# Altium PCB piponic_pcb_v2.PcbDoc
Units mm, origin at the board's own origin, x right, y up, seen from the top; angles counter-clockwise.
Board outline 79.88 x 73.28 mm, 2 copper layers (Top Layer, Bottom Layer); 32 components, 46 nets, 137 pads, 4 vias.
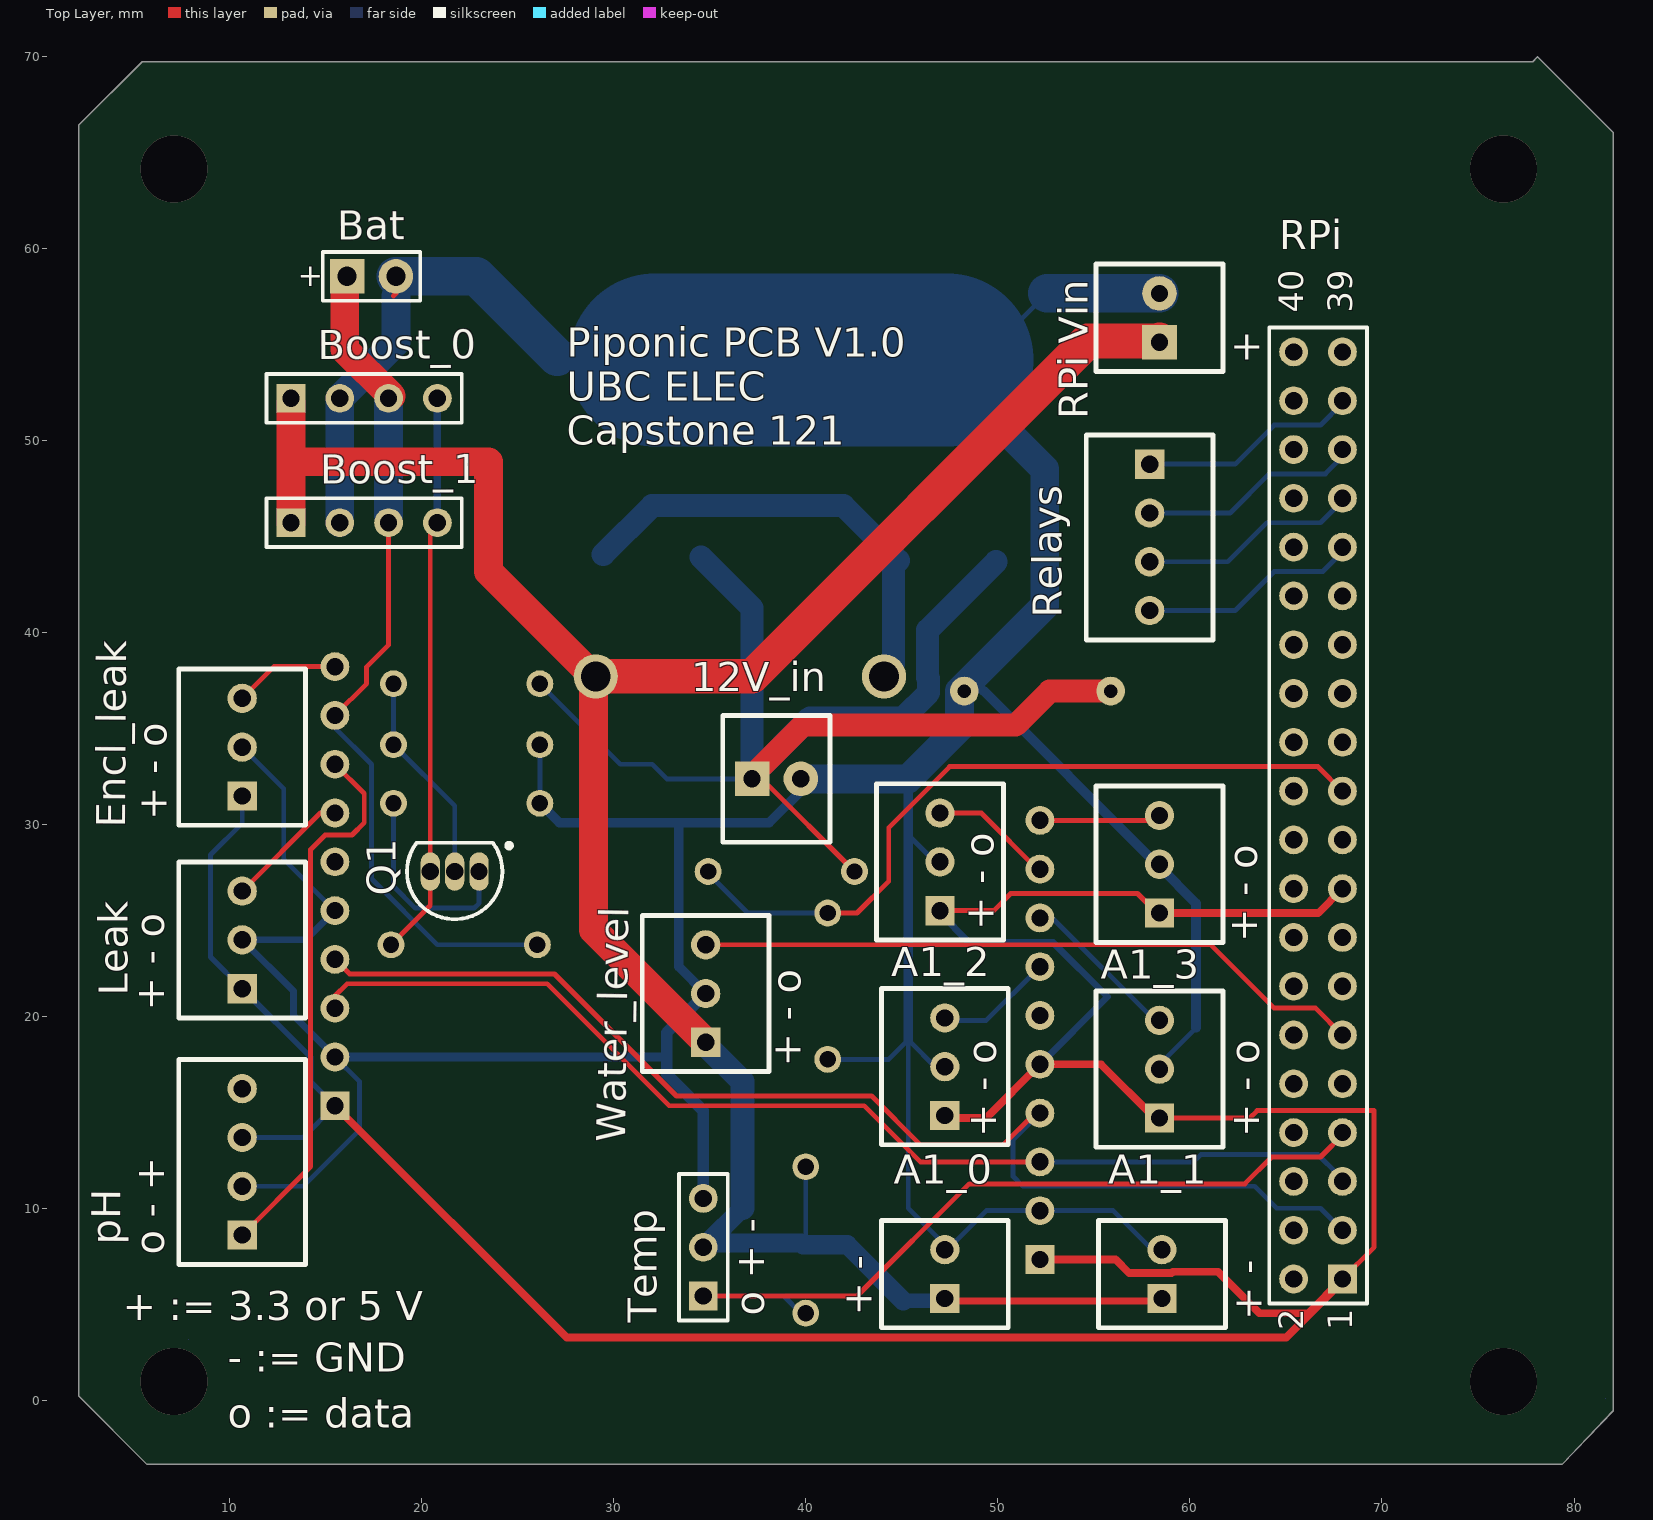
[diagram p0: Top Layer view]
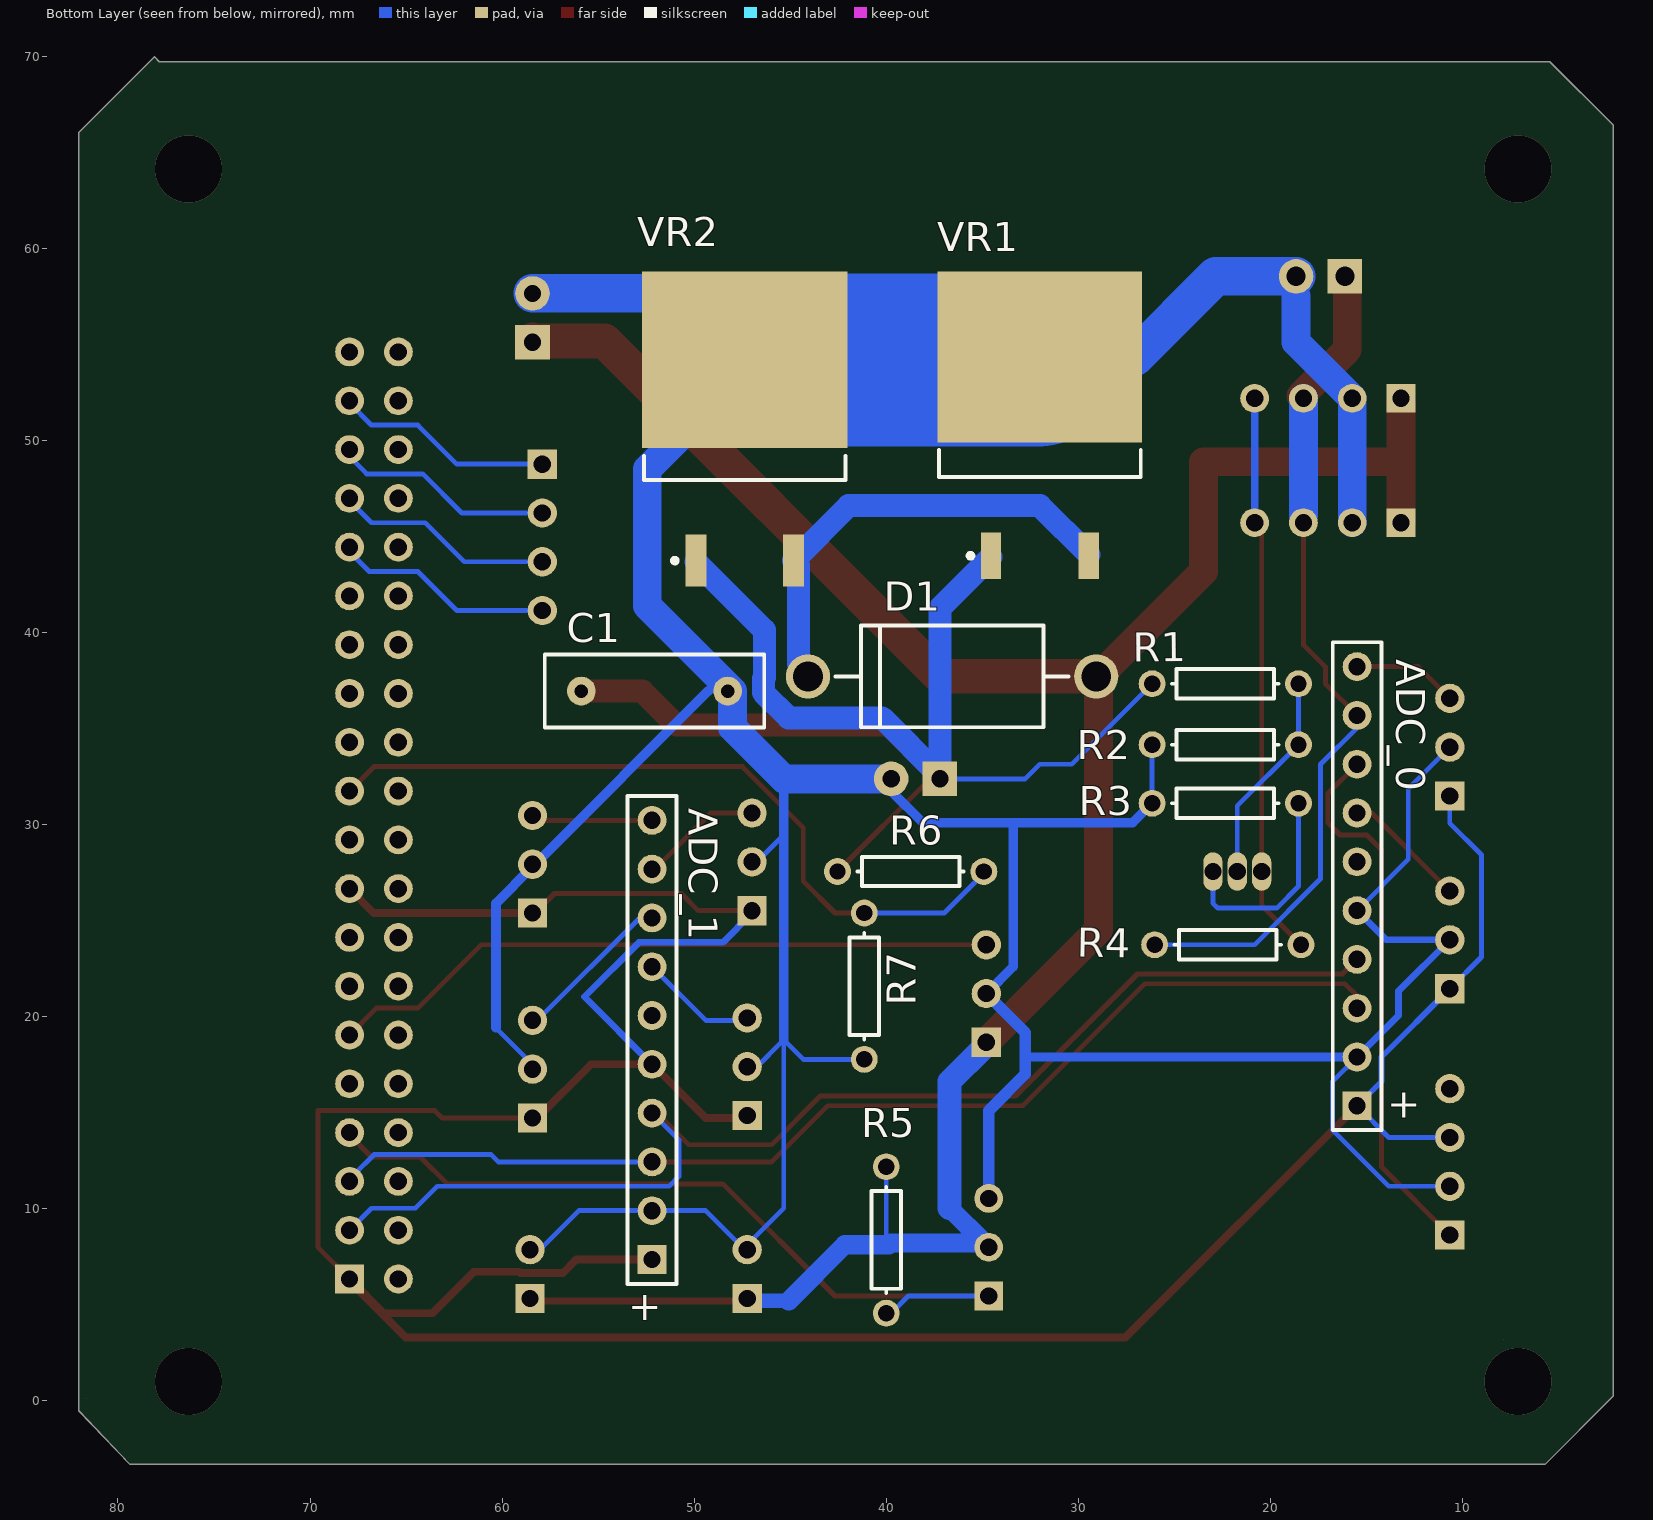
[diagram p1: Bottom Layer view, seen from below]

## Layer stack, top to bottom
Top Solder: solder mask 0.0102, Solder Resist, Dk 3.5
Top Layer: signal copper 0.0356
Dielectric 1: dielectric 0.32, FR-4, Dk 4.8
Bottom Layer: signal copper 0.0356
Bottom Solder: solder mask 0.0102, Solder Resist, Dk 3.5

## Board outline
5.715,-3.302 79.375,-3.302 82.042,-0.508 82.042,-0.381 82.042,66.04 78.105,69.977 77.851,69.723 5.461,69.723 2.159,66.421 2.159,0.254
cut-out: 7.874,3.175
cut-out: -6.477,17.907
cut-out: 84.709,0.127
cut-out: 81.661,0.127

## Design rules (kind name [scope] priority, off if disabled: settings)
Clearance [All] p1: gap=0.254 ignorepadtopadclearanceinfootprint=TRUE except(0: Arc-Hole Track-Hole SMDPad-Hole THPad-Hole Via-Hole Fill-Hole Poly-Hole Region-Hole Text-Hole; 0.1: Arc-Text Track-Text SMDPad-SMDPad SMDPad-Text THPad-Text Via-Text Fill-Text Poly-Text Region-Text Text-Text)
PolygonConnect [All] p1: connectstyle=Relief reliefconductorwidth=0.254 reliefentries=4 polygonreliefangle="90 Angle" airgapwidth=0.254
RoutingVias [All] p1: holewidth=0.711 width=1.27 viastyle="Through Hole" minholewidth=0.711 minwidth=1.27 maxholewidth=0.711 maxwidth=1.27
SilkToSilkClearance [All] p1: silktosilkclearance=0.1
SilkToSolderMaskClearance [IsPad] p1: minsilkscreentomaskgap=0.1 clearancetoexposedcopper=TRUE
SolderMaskExpansion [All] p1: expansion=0.102
Width [All] p1: maxlimit=10 minlimit=0.254 preferedwidth=0.254 checkconnectedcopper=TRUE
28 further rules are at their usual default settings.

## Classes and differential pairs
channel class leak_sensor: Enclosure_leak_detector "Leak Detector"
channel class ADS1115: ADC_0 ADC_1
component class water_quality_sensor_hub: 12V_in "+ -" A1_0 A1_1 A1_2 A1_3 Bat C1 D1 R6 R7 Relays "V1+ -"
component class SHDN_circuit: Q1 R1 R2 R3 R4
component class "Sensor MCU": "RPi " "RPi Vin"
component class SEN0204-ND: Water_level
component class PH0-14: pH
component class "Leak Detector": Leak
component class Enclosure_leak_detector: Encl_leak
component class DS18B21: R5 Temp
component class "Backup Power Boost Board": Boost_0 Boost_1
component class ADC_1: ADC_1
component class 5V_regulator: VR1 VR2

## Components (designator, comment, footprint, x,y, rotation, side; value= is the part's Value field where it differs from the comment)
12V_in "Header 2" 2_channel_terminal_block#1 37.211,32.385 r0 top
"+ -" "5V" 2_channel_terminal_block#2 47.244,5.334 r90 top (schematic designator "V1+ -")
"+ -" "5V" 2_channel_terminal_block#2 58.547,5.334 r90 top (schematic designator "V0+ -")
A1_0 "3V3" 3_channel_terminal_block 47.244,14.859 r90 top
A1_1 "3V3" 3_channel_terminal_block 58.42,14.732 r90 top
A1_2 "3V3" 3_channel_terminal_block 46.99,25.526 r90 top
A1_3 "3V3" 3_channel_terminal_block 58.42,25.4 r90 top
ADC_0 "ADS1*15" HDR1X10 15.494,15.367 r90 bottom (schematic designator ADC_1)
ADC_1 "ADS1*15" HDR1X10 52.197,7.365 r90 bottom
Bat "Battery" BAT-2 17.399,58.547 r0 top
Boost_0 "Header 4" HDR1X4 13.208,52.197 r0 top
Boost_1 "Header 4" HDR1X4 13.208,45.72 r0 top
C1 "Cap" RAD-0.3 52.07,36.957 r0 bottom value=4.7uF
D1 "STPS5L60" STM-DO-201AD 36.576,37.719 r0 bottom
Encl_leak "Leak Sensor" 3_channel_terminal_block 10.668,31.496 r90 top (schematic designator Leak)
Leak "Leak Sensor" 3_channel_terminal_block 10.668,21.463 r90 top
pH "pH Sensor" 4_channel_terminal_block 10.668,8.636 r90 top
Q1 "2N3904" TO-92A 21.729,27.559 r90 top
R1 "Res1" AXIAL-0.3 22.352,37.338 r180 bottom value=10k
R2 "Res1" AXIAL-0.3 22.352,34.163 r180 bottom value=1k
R3 "Res1" AXIAL-0.3 22.352,31.115 r180 bottom value=220
R4 "Res1" AXIAL-0.3 22.225,23.749 r180 bottom value=900k
R5 "" AXIAL-0.3 40.005,8.382 r270 bottom value=4.7K
R6 "Res1" AXIAL-0.3 38.735,27.562 r180 bottom value=10K
R7 "Res1" AXIAL-0.3 41.148,21.59 r90 bottom value=3.9k
Relays "Relay Header" 4_channel_terminal_block 57.912,48.768 r270 top
RPi "Header 20X2" HDR2X20 67.945,6.35 r90 top (schematic designator P12)
"RPi Vin" "RPi Power" 2_channel_terminal_block#1 58.42,55.118 r90 top
Temp "Temp Sensor" HDR1X3 34.671,5.461 r90 top
VR1 "Volt Reg" D2PAK_N 32.004,50.799 r90 bottom
VR2 "Volt Reg" D2PAK_M 47.371,50.599 r90 bottom
Water_level "WL Sensor" 3_channel_terminal_block 34.798,18.668 r90 top

## Footprints (in the part's own frame and the unit in brackets; to place one, negate y for a bottom-side part, rotate by r counter-clockwise, add the part's x,y. Pads: shape width x height; smd on the part's side, far side on the other; paste and mask are expansions set on the pad)
2_channel_terminal_block#1 [mm] "2 Position Wire to Board Terminal Block OSTVN02A150 - Horizontal with Board 0.100\" (2.54mm) Through Hole"
  rect 1.8x1.8 hole 0.9: 1(0,0)
  round 1.8 hole 0.9: 2(2.54,0)
  Top Overlay keep-out lines w0.254: -1.524,-3.302 4.064,-3.302 4.064,3.302 -1.524,3.302 -1.524,-3.302
  silkscreen extent -1.52,-3.3 4.06,3.3
2_channel_terminal_block#2 [mm] "2 Position Wire to Board Terminal Block OSTVN02A150 - Horizontal with Board 0.100\" (2.54mm) Through Hole"
  rect 1.524x1.524 hole 0.9: 1(0,0)
  round 1.524 hole 0.9: 2(2.54,0)
  Top Overlay keep-out lines w0.254: -1.524,3.302 -1.524,-3.302 4.064,-3.302 4.064,3.302 -1.524,3.302
  silkscreen extent -1.52,-3.3 4.06,3.3
3_channel_terminal_block [mil] "OSTVN03A150 - 3Position Wire to Board Terminal Block Horizontal with Board 0.100\" (2.54mm) Through Hole"
  rect 60x60 hole 35.43: 1(0,0)
  round 60 hole 35.43: 2(100,0) 3(200,0)
  Top Overlay keep-out lines w10: -60,130 260,130 260,-130 -60,-130 -60,130
  silkscreen extent -60,-130 260,130
4_channel_terminal_block [mil] "OSTVN04A150 - 4 Position Wire to Board Terminal Block Horizontal with Board 0.100\" (2.54mm) Through Hole"
  rect 60x60 hole 35.43: 1(0,0)
  round 60 hole 35.43: 2(100,0) 3(200,0) 4(300,0)
  Top Overlay keep-out lines w10: -60,130 -60,-130 360,-130 360,130 -60,130
  silkscreen extent -60,-130 360,130
AXIAL-0.3 [mm] "Axial Device, Thru-Hole; 2 Leads; 0.3 in Pin Spacing"
  round 1.4 hole 0.85: 1(-3.81,0) 2(3.81,0)
  silkscreen extent -2.77,-0.76 2.77,0.76
BAT-2 [mm] "Battery; 2 Leads"
  rect 1.8x1.8 hole 1: 1(-1.27,0)
  round 1.8 hole 1: 2(1.27,0)
  silkscreen extent -2.54,-1.27 2.54,1.27
D2PAK_M [mm] "D2-PAK, 4-Leads, Body 8.8x10.4mm, Pitch 2.54mm, Lead Span 15.1mm, IPC Low Density"
  rect 2.7x1.1 smd: 1(-6.85,2.54) 3(-6.85,-2.54)
  rect 9.2x10.7 smd: 2(3.6,0)
  silkscreen extent -6.97,-5.25 -1.4,5.25, body extent -2.65,-5.28 6.35,5.28, height 4.69
D2PAK_N [mm] "D2-PAK, 4-Leads, Body 8.8x10.4mm, Pitch 2.54mm, Lead Span 15.1mm, IPC Medium Density"
  rect 2.4x1.05 smd: 1(-6.8,2.54) 3(-6.8,-2.54)
  rect 8.9x10.65 smd: 2(3.55,0)
  silkscreen extent -6.92,-5.25 -1.3,5.25, body extent -2.7,-5.28 6.3,5.28, height 4.69
HDR1X3 [mm] "Connector; Header; 3 Position"
  rect 1.5x1.5 hole 0.9: 1(0,0)
  round 1.5 hole 0.9: 2(2.54,0) 3(5.08,0)
  silkscreen extent -1.27,-1.27 6.35,1.27
HDR1X4 [mm] "Connector; Header; 4 Position"
  rect 1.5x1.5 hole 0.9: 1(0,0)
  round 1.5 hole 0.9: 2(2.54,0) 3(5.08,0) 4(7.62,0)
  silkscreen extent -1.27,-1.27 8.89,1.27
HDR1X10 [mm] "Connector; Header; 10 Position"
  rect 1.5x1.5 hole 0.9: 1(0,0)
  round 1.5 hole 0.9: 2(2.54,0) 3(5.08,0) 4(7.62,0) 5(10.16,0) 6(12.7,0) 7(15.24,0) 8(17.78,0) 9(20.32,0) 10(22.86,0)
  silkscreen extent -1.27,-1.27 24.13,1.27
HDR2X20 [mm] "Connector; Header; 20x2 Position"
  rect 1.5x1.5 hole 0.9: 1(0,0)
  round 1.5 hole 0.9: 2(0,2.54) 3(2.54,0) 4(2.54,2.54) 5(5.08,0) 6(5.08,2.54) 7(7.62,0) 8(7.62,2.54) 9(10.16,0) 10(10.16,2.54) 11(12.7,0) 12(12.7,2.54) 13(15.24,0) 14(15.24,2.54) 15(17.78,0) 16(17.78,2.54) 17(20.32,0) 18(20.32,2.54) 19(22.86,0) 20(22.86,2.54) 21(25.4,0) 22(25.4,2.54) 23(27.94,0) 24(27.94,2.54) 25(30.48,0) 26(30.48,2.54) 27(33.02,0) 28(33.02,2.54) 29(35.56,0) 30(35.56,2.54) 31(38.1,0) 32(38.1,2.54) 33(40.64,0) 34(40.64,2.54) 35(43.18,0) 36(43.18,2.54) 37(45.72,0) 38(45.72,2.54) 39(48.26,0) 40(48.26,2.54)
  silkscreen extent -1.27,-1.27 49.53,3.81
RAD-0.3 [mm] "Radial Cap, Thru-Hole; 2 Leads; 0.3 in Pin Spacing"
  round 1.5 hole 0.7: 1(-3.81,0) 2(3.81,0)
  silkscreen extent -5.71,-1.91 5.71,1.91
STM-DO-201AD [mm] "THD, 2-Leads, Body 9.5x5.3mm"
  round 2.3 hole 1.55: 1(-7.5,0) 2(7.5,0)
  silkscreen extent -6.08,-2.65 6.07,2.65, body extent -8.15,-2.67 8.15,2.65, height 5.65
TO-92A [mm] "TO, Flat Index; 3 In-Line, Axial Leads; Body Dia. 4.5mm; Leads 0.51 x 0.48 mm (max)"
  oval 2x1 hole 0.9: 1(0,-1.27) 2(0,0) 3(0,1.27)
  silkscreen extent -2.48,-2.96 1.5,2.48, body extent -2.48,-2.5 1.5,2.5, height 6.86

## Part data
12V_in: "Power 12V in", LatestRevisionDate=17-Jul-2002, LatestRevisionNote="Re-released for DXP Platform.", Publisher="Altium Limited"
"+ -" "+ -": library part "Header 2", "Header, 2-Pin", LatestRevisionDate=17-Jul-2002, LatestRevisionNote="Re-released for DXP Platform.", Publisher="Altium Limited"
A1_0 A1_1 A1_2 A1_3 Encl_leak Leak Temp Water_level: library part "Header 3", "Header, 3-Pin", LatestRevisionDate=17-Jul-2002, LatestRevisionNote="Re-released for DXP Platform.", Publisher="Altium Limited"
ADC_0 ADC_1: library part "Header 10", "Header, 10-Pin", LatestRevisionDate=17-Jul-2002, LatestRevisionNote="Re-released for DXP Platform.", Publisher="Altium Limited"
Bat: "2AA batteries", LatestRevisionDate=17-Jul-2002, LatestRevisionNote="Re-released for DXP Platform.", PackageDescription="Battery; 2 Leads", PackageReference=BAT-2, Published=24-Mar-1999, Publisher="Altium Limited"
Boost_0 Boost_1: "Header, 4-Pin", LatestRevisionDate=17-Jul-2002, LatestRevisionNote="Re-released for DXP Platform.", Publisher="Altium Limited"
C1: "Capacitor", LatestRevisionDate=17-Jul-2002, LatestRevisionNote="Re-released for DXP Platform.", PackageDescription="Radial Cap, Thru-Hole; 2 Leads; 0.3 in Pin Spacing", PackageReference=RAD-0.3, Published=8-Jun-2000, Publisher="Altium Limited"
D1: library part CMP-2000-05365-1, "Power Schottky rectifier, 60 V, 5 A, 2-Pin DO-201AD, RoHS, Cut Tape", Capacitance @ Vr, F=-, Current - Average Rectified (Io)=5A, Current - Reverse Leakage @ Vr=220礎@60V, Manufacturer=STMicroelectronics, Operating Temperature - Junction=150degC(Max), Package / Case=DO-201AD,Axial, Package Description="2-Pin Axial Lead, Dia 5.3 mm, Body Length 9.5 mm", Package Reference=DO-201AD, Standard Package=600, Voltage - DC Reverse (Vr) (Max)=60V, Voltage - Forward (Vf) (Max) @ If=520mV@5A, Category=DiscreteSemiconductorProducts, Datasheet URL=http://download.siliconexpert.com/pdfs/2012/8/10/13/5/5/781/st_/manual/cd00002924.pdf, Datasheet Version="Rev. 3, 05/2008", Diode Type=Schottky, Family=Diodes,Rectifiers-Single, Manufacturer URL=http://www.st.com/, Mounting Type=ThroughHole, Online Catalog=SchottkyDiode, Other Names=497-12673-3STPS5L60-ND, Other Related Documents=STPS5L60ViewAllSpecifications, Package URL=http://download.siliconexpert.com/pdfs/2012/8/10/13/5/5/781/st_/manual/cd00002924.pdf, Packaging=Tape&Box(TB)牋, Reverse Recovery Time (trr)=-, Series=-, Speed=FastRecovery=200mA(Io), Supplier Device Package=DO-201AD
pH: library part "Header 4", "Header, 4-Pin", LatestRevisionDate=17-Jul-2002, LatestRevisionNote="Re-released for DXP Platform.", Publisher="Altium Limited"
Q1: "NPN General Purpose Amplifier", ComponentLink1Description="Manufacturer Link", ComponentLink1URL=http://www.fairchildsemi.com/, ComponentLink2Description=Datasheet, ComponentLink2URL=http://www.fairchildsemi.com/ds/2N%2F2N3904.pdf, DatasheetVersion=1997, LatestRevisionDate=15-Jan-2003, LatestRevisionNote="PCB Footprint 'BCY-W3/D4.7' replaced", PackageDescription="TO, Flat Index; 3 In-Line, Axial Leads; Body Dia. 4.5mm; Leads 0.51 x 0.48 mm (max)", PackageReference=TO-92A, PackageVersion=Sep-1998, Published=8-Jun-2000, Publisher="Altium Limited"
R1 R2 R3 R4 R6 R7: "Resistor", LatestRevisionDate=17-Jul-2002, LatestRevisionNote="Re-released for DXP Platform.", PackageDescription="Axial Device, Thru-Hole; 2 Leads; 0.3 in Pin Spacing", PackageReference=AXIAL-0.3, Published=8-Jun-2000, Publisher="Altium Limited"
R5: library part Res1, "Pull up", LatestRevisionDate=17-Jul-2002, LatestRevisionNote="Re-released for DXP Platform.", PackageDescription="Axial Device, Thru-Hole; 2 Leads; 0.3 in Pin Spacing", PackageReference=AXIAL-0.3, Published=8-Jun-2000, Publisher="Altium Limited"
Relays: library part "Header 4", "Relay Control", LatestRevisionDate=17-Jul-2002, LatestRevisionNote="Re-released for DXP Platform.", Publisher="Altium Limited"
RPi: "GPIO shield for RPi", LatestRevisionDate=17-Jul-2002, LatestRevisionNote="Re-released for DXP Platform.", Publisher="Altium Limited"
"RPi Vin": library part "Header 2", "Power Pins", LatestRevisionDate=17-Jul-2002, LatestRevisionNote="Re-released for DXP Platform.", Publisher="Altium Limited"
VR1 VR2: "Voltage Regulator", LatestRevisionDate=29-May-2009, LatestRevisionNote="IPC-7351 Footprint Added.", PackageDescription="3-Pin Transistor Outline Package 2.54 mm Pitch, 15.1 mm Lead Span", PackageReference=D2PAK, Published=24-Mar-1999, Publisher="Altium Limited"

## Via types
v1: diameter 3.5, hole 3.5, Top Layer to Bottom Layer, 4 vias

## Nets (pads, with @x,y where several pads share a name; then routed paths per layer and width w, separated by ;. In a path a pad name is that pad's centre, name@x,y a point inside that pad or via, vN(x,y) a via of type N, cw(c..) or ccw(c..) an arc to the next point about the centre after c; other vN are vias at no path point)
3V3: A1_0.1 A1_1.1 A1_2.1 A1_3.1 ADC_0.1 ADC_1.1 ADC_1.5 Encl_leak.1 Leak.1 pH.3 RPi.1 RPi.17 | length 173.5
  Top Layer w0.254: A1_2.1 49.783,25.526 50.673,26.416 57.277,26.416 A1_3.1@58.293,25.4 ; A1_1.1@58.166,14.731 63.118,14.731 63.5,15.113 69.595,15.113 69.596,15.112 69.596,8.001 RPi.1
  Top Layer w0.4: ADC_0.1 27.559,3.302 65.024,3.302 RPi.1@67.818,6.096 ; A1_0.1@46.99,14.731 49.402,14.731 ADC_1.5 ; ADC_1.1 56.135,7.365 56.842,6.658 59.051,6.658 59.124,6.731 61.468,6.731 63.627,4.572 66.167,4.572 RPi.1 ; ADC_1.5 55.373,17.525 A1_1.1@58.166,14.732 ; A1_3.1@58.293,25.4 66.675,25.4 RPi.17
  Bottom Layer w0.254: pH.3 13.843,13.716 ADC_0.1 ; Leak.1 9.017,23.114 9.017,28.426 10.668,30.077 Encl_leak.1
  Bottom Layer w0.3: Leak.1 14.224,17.907 14.224,16.637 ADC_0.1
  Bottom Layer w0.35: A1_2.1@46.99,25.4 48.514,23.876 52.876,23.876 55.712,21.04 ADC_1.5
5V: "+ -.1" "RPi Vin.1" Boost_0.1 Boost_1.1 D1.1 R5.1 Temp.2 Water_level.1 | length 128.5
  Top Layer w0.254: Boost_0.1@13.208,51.943 Boost_0.1@13.462,52.197
  Top Layer w0.35: 47.626,5.206 58.166,5.206
  Top Layer w1.5: Boost_1.1 Boost_0.1@13.208,51.943 ; 13.462,48.895 23.495,48.895 23.495,43.173 28.949,37.719 28.949,24.518 Water_level.1@34.671,18.796
  Top Layer w1.8: D1.1@28.949,37.719 D1.1 37.211,37.719 54.673,55.181 58.356,55.181 58.42,55.245
  Bottom Layer w0.254: Temp.2 Temp.2@34.893,8.223 ; 39.751,8.223 40.005,8.477 R5.1
  Bottom Layer w0.75: 45.085,5.207 47.626,5.207
  Bottom Layer w1: 36.703,10.033 34.893,8.223 39.751,8.223 ; 39.878,8.128 42.164,8.128 45.085,5.207
  Bottom Layer w1.25: Water_level.1@34.925,18.415 36.703,16.637 36.703,10.033
12V: 12V_in.1 C1.2 R1.1 R6.1 VR1.1 VR2.1 | length 73
  Top Layer w0.254: 12V_in.1 37.722,32.385 R6.1 ; C1.2@55.626,36.957 C1.2
  Top Layer w1.2: 12V_in.1 37.211,32.546 39.844,35.179 50.927,35.179 52.705,36.957 C1.2@55.626,36.957
  Bottom Layer w0.254: R1.1 30.353,33.147 32.004,33.147 32.766,32.385 12V_in.1
  Bottom Layer w1.2: VR1.1@34.544,43.942 37.211,41.275 12V_in.1@37.211,32.546 ; 12V_in.1 12V_in.1@37.211,32.546 ; VR2.1@49.911,43.688 46.355,40.132 46.355,37.668 46.402,37.621 46.402,36.877 45.085,35.56 40.225,35.56 12V_in.1@37.211,32.546
GND: 12V_in.2 "+ -.2" "RPi Vin.2" A1_0.2 A1_1.2 A1_2.2 A1_3.2 ADC_0.2 ADC_0.5 ADC_1.2 Bat.2 Boost_0.2 Boost_1.2 C1.1 Encl_leak.2 Leak.2 pH.2 R2.1 R3.1 R7.1 Temp.3 VR1.2 VR2.2 Water_level.2 | length 255.7
  Top Layer w0.254: 18.542,57.531 Bat.2@18.669,57.658
  Bottom Layer w0.254: pH.2 13.843,11.176 16.764,14.097 16.764,16.637 ADC_0.2 ; Encl_leak.2 12.827,31.877 12.827,28.194 ADC_0.5 ; Boost_1.2@15.748,45.339 Boost_1.2 ; Bat.2@18.669,57.658 Bat.2 ; R3.1 R2.1 ; VR1.2@27.058,54.349 VR1.2 ; 12V_in.2@39.751,31.75 12V_in.2 ; R7.1 44.323,17.78 45.339,18.796 ; 45.339,29.464 A1_2.2@46.736,28.067 ; A1_0.2@46.863,17.272 45.339,18.796 ; VR2.2 49.119,54.199 VR2.2@52.578,57.658 ; 47.498,8.001 49.402,9.905 ADC_1.2 ; 47.625,7.747 45.339,10.033 45.339,18.796 ; C1.1@48.006,36.957 C1.1 49.276,36.957 ; ADC_1.2@51.943,9.906 56.006,9.906 58.166,7.746 ; A1_1.2@58.166,17.272 60.324,19.43
  Bottom Layer w0.35: ADC_0.2 13.335,20.066 13.335,21.336 Leak.2 13.97,24.003 ADC_0.5
  Bottom Layer w0.45: ADC_0.2 32.766,17.907
  Bottom Layer w0.5: R3.1 27.178,30.099 33.401,30.099 ; Water_level.2 33.401,22.605 33.401,30.099 ; 12V_in.2@39.751,31.75 38.1,30.099 33.401,30.099 ; 45.339,18.796 45.339,29.464 45.339,32.385 ; 49.276,36.957 A1_3.2@58.166,28.067 ; A1_3.2@58.166,28.066 58.42,27.812 60.324,25.908 60.324,19.43
  Bottom Layer w0.6: Temp.3 34.671,15.113 32.766,17.018 32.766,17.907 32.766,19.177 Water_level.2
  Bottom Layer w1.5: Boost_1.2 Boost_0.2 18.669,55.118 18.669,57.531 ; 12V_in.2 45.339,32.385 48.006,35.052 48.006,36.957 52.451,41.402 52.451,48.514 VR2.2@47.244,53.721
  Bottom Layer w2: Bat.2 22.86,58.547 VR1.2@27.058,54.349 ; VR2.2@52.578,57.658 58.42,57.658
  Bottom Layer w9: VR1.2@32.161,54.199 VR2.2
NetA1_0_3: A1_0.3 ADC_1.7 | length 6.2
  Bottom Layer w0.254: A1_0.3@46.99,19.811 49.402,19.811 ADC_1.7@52.07,22.479
NetA1_1_3: A1_1.3 ADC_1.8 | length 8.2
  Bottom Layer w0.254: ADC_1.8@52.197,25.273 52.704,25.273 A1_1.3@58.166,19.811
NetA1_2_3: A1_2.3 ADC_1.9 | length 6.5
  Top Layer w0.254: A1_2.3 49.15,30.606 ADC_1.9@52.197,27.559
NetA1_3_3: A1_3.3 ADC_1.10 | length 6.1
  Top Layer w0.254: ADC_1.10 57.784,30.225 A1_3.3@58.166,30.607
NetADC_1_ADC_0_3: ADC_0.3 ADC_1.3 RPi.5 | length 57.5
  Top Layer w0.254: ADC_0.3 15.494,21.082 16.129,21.717 26.543,21.717 32.893,15.367 43.053,15.367 45.974,12.446 ADC_1.3
  Bottom Layer w0.254: ADC_1.3 60.197,12.445 60.579,12.827 66.675,12.827 RPi.5@67.691,11.811
NetADC_1_ADC_0_4: ADC_0.4 ADC_1.4 RPi.3 | length 63.1
  Top Layer w0.254: ADC_0.4 16.256,22.225 26.924,22.225 33.274,15.875 43.434,15.875 45.974,13.335 50.292,13.335 ADC_1.4@51.816,14.859
  Bottom Layer w0.254: ADC_1.4 50.8,13.588 50.8,11.684 51.308,11.176 63.373,11.176 64.516,10.033 66.802,10.033 RPi.3
NetADC_1_ADC_0_6: ADC_0.6
NetADC_1_ADC_0_7: ADC_0.7 Leak.3 | length 6.5
  Top Layer w0.254: Leak.3 14.732,30.607 ADC_0.7
NetADC_1_ADC_0_8: ADC_0.8 pH.1 | length 28.6
  Top Layer w0.254: pH.1 14.224,12.192 14.224,28.702 14.986,29.464 16.383,29.464 17.018,30.099 17.018,31.623 ADC_0.8
NetADC_1_ADC_0_10: ADC_0.10 Encl_leak.3 | length 5.5
  Top Layer w0.254: Encl_leak.3 12.319,38.227 ADC_0.10
NetADC_1_ADC_1_6: ADC_1.6
NetD1_2: D1.2 VR1.3 VR2.3 | length 24.2
  Bottom Layer w0.254: D1.2@43.815,37.592 D1.2@44.577,38.354
  Bottom Layer w1.2: VR1.3@29.464,44.069 32.004,46.609 41.971,46.609 VR2.3 44.577,43.495 D1.2@44.577,38.354
NetP12_2: RPi.2
NetP12_7: R5.2 RPi.7 Temp.1 | length 42.6
  Top Layer w0.254: Temp.1 42.672,5.461 48.514,11.303 62.865,11.303 64.262,12.7 66.802,12.7 RPi.7@68.072,13.97
  Bottom Layer w0.254: Temp.1 38.862,5.461 39.751,4.572 R5.2
NetP12_8: RPi.8
NetP12_10: RPi.10
NetP12_11: RPi.11 Water_level.3 | length 35.1
  Top Layer w0.254: Water_level.3 61.088,23.748 64.389,20.447 66.548,20.447 RPi.11
NetP12_12: RPi.12
NetP12_13: RPi.13
NetP12_15: RPi.15
NetP12_16: RPi.16
NetP12_18: RPi.18
NetP12_19: RPi.19
NetP12_21: R6.2 R7.2 RPi.21 | length 39.3
  Top Layer w0.254: R7.2 42.672,25.4 44.323,27.051 44.323,29.845 47.498,33.02 66.675,33.02 RPi.21
  Bottom Layer w0.254: R6.2 34.925,27.46 36.985,25.4 R7.2
NetP12_22: RPi.22
NetP12_23: RPi.23
NetP12_24: RPi.24
NetP12_26: RPi.26
NetP12_29: RPi.29
NetP12_31: Relays.4 RPi.31 | length 11.8
  Bottom Layer w0.254: Relays.4 62.357,41.148 64.389,43.18 66.929,43.18 RPi.31@68.326,44.577
NetP12_32: RPi.32
NetP12_33: Relays.3 RPi.33 | length 11.2
  Bottom Layer w0.254: Relays.3 61.976,43.688 64.008,45.72 66.802,45.72 RPi.33@67.818,46.736
NetP12_35: Relays.2 RPi.35 | length 11.2
  Bottom Layer w0.254: Relays.2 62.103,46.228 64.135,48.26 67.056,48.26 RPi.35@67.945,49.149
NetP12_36: RPi.36
NetP12_37: Relays.1 RPi.37 | length 11.3
  Bottom Layer w0.254: Relays.1 62.357,48.768 64.389,50.8 66.802,50.8 RPi.37@67.945,51.943
NetP12_38: RPi.38
NetP12_40: RPi.40
NetpH_4: pH.4
NetQ1_1: Q1.1 R3.2 | length 11
  Bottom Layer w0.254: R3.2 18.542,26.797 19.685,25.654 22.733,25.654 22.999,25.92 Q1.1
NetQ1_2: Q1.2 R1.2 R2.2 | length 11.1
  Bottom Layer w0.254: R1.2 R2.2 21.729,30.976 Q1.2
SHDN: Boost_0.4 Boost_1.4 Q1.3 R4.2 | length 29.3
  Top Layer w0.254: R4.2 20.459,25.793 Q1.3 20.459,45.351 Boost_1.4
  Bottom Layer w0.4: Boost_1.4@20.828,45.847 Boost_0.4
Vbat: ADC_0.9 Bat.1 Boost_0.3 Boost_1.3 R4.1 | length 44
  Top Layer w0.254: ADC_0.9 17.145,37.338 17.145,38.219 18.288,39.362 Boost_1.3
  Top Layer w1.5: Bat.1@16.002,58.547 16.002,54.737 Boost_0.3@18.415,52.324
  Bottom Layer w0.254: ADC_0.9 15.494,35.052 17.399,33.147 17.399,27.177 20.827,23.749 R4.1 ; Boost_1.3@18.288,46.101 Boost_1.3@18.415,45.974
  Bottom Layer w1.5: Boost_1.3@18.288,46.101 Boost_0.3
pads on no net: RPi.4 RPi.6 RPi.9 RPi.14 RPi.20 RPi.25 RPi.27 RPi.28 RPi.30 RPi.34 RPi.39
copper on no net:
  other v1: 7.112,1.016 76.327,1.016 7.112,64.135 76.327,64.135

## Polygon pours and split planes (outlines as drawn)
no net on Top Paste (solid): 64.77,67.183

## Silkscreen, mask and mechanical layers (free items; w line width, h text height)
Top Overlay:
  lines w0.254: 7.366,7.112 13.97,7.112 13.97,17.526 13.97,17.78 7.366,17.78 7.366,7.112 ; 7.366,19.939 7.366,28.067 13.97,28.067 13.97,19.939 7.366,19.939 ; 7.366,29.972 7.366,38.1 13.97,38.1 13.97,29.972 7.366,29.972 ; 31.496,17.144 31.496,25.272 38.1,25.272 38.1,17.144 31.496,17.144 ; 35.687,29.083 35.687,35.687 41.275,35.687 41.275,29.083 35.687,29.083 ; 43.688,24.002 43.688,32.13 50.292,32.13 50.292,24.002 43.688,24.002 ; 43.942,3.81 43.942,9.398 50.546,9.398 50.546,3.81 43.942,3.81 ; 43.942,13.335 43.942,21.463 50.546,21.463 50.546,13.335 43.942,13.335 ; 54.61,39.624 54.61,50.292 61.214,50.292 61.214,39.624 54.61,39.624 ; 55.118,13.208 55.118,21.336 61.722,21.336 61.722,13.208 55.118,13.208 ; 55.118,23.876 61.722,23.876 61.722,32.004 55.118,32.004 55.118,23.876 ; 55.118,53.594 61.722,53.594 61.722,59.182 55.118,59.182 55.118,53.594 ; 55.245,3.81 55.245,9.398 61.849,9.398 61.849,3.81 55.245,3.81
  text "+" at 62.103,54.199 h1.52
  text "Piponic PCB V1.0 / UBC ELEC  / Capstone 121" at 27.559,49.784 h1.52
  text "+ - o" at 6.732,30.226 h1.52 r90
  text "+ - o" at 49.785,24.511 h1.52 r90
  text "+ - o" at 63.501,23.876 h1.52 r90
  text "+ - o" at 6.604,20.32 h1.52 r90
  text "+ - o" at 39.752,17.399 h1.52 r90
  text "+ - o" at 49.911,13.716 h1.52 r90
  text "+ - o" at 63.627,13.716 h1.52 r90
  text "o - +" at 6.604,7.62 h1.52 r90
  text "o + -" at 37.846,4.445 h1.52 r90
  text "+ := 3.3 or 5 V" at 4.445,4.191 h1.52
  text "- := GND" at 9.906,1.524 h1.52
  text "o := data" at 9.906,-1.397 h1.52
Bottom Overlay:
  text "+" at 12.192,14.732 h1.52
  text "+" at 51.689,4.191 h1.52
Top Paste:
  lines w0.254: 7.112,1.016 7.302,0.826 7.493,1.016 76.327,1.016 76.327,64.135 7.112,64.135 7.112,1.016

## Text inside footprints (layer, text, board x,y; h text height)
Bat: Top Overlay "+" at 13.553,58.039 h1.15
RPi: Top Overlay "39" at 68.453,56.642 h1.27 r90; Top Overlay "40" at 65.913,56.642 h1.27 r90; Top Overlay "2" at 65.913,3.683 h1.27 r90; Top Overlay "1" at 68.453,3.683 h1.27 r90